# Altium PCB CLK_DISTRO.PcbDoc
Units mil, origin at the board's own origin, x right, y up, seen from the top; angles counter-clockwise.
Board outline 2000 x 1000 mil, 2 copper layers (Top Layer, Bottom Layer); 31 components, 21 nets, 79 pads, 20 vias.
Unrouted connection lines stored in the file: 13.
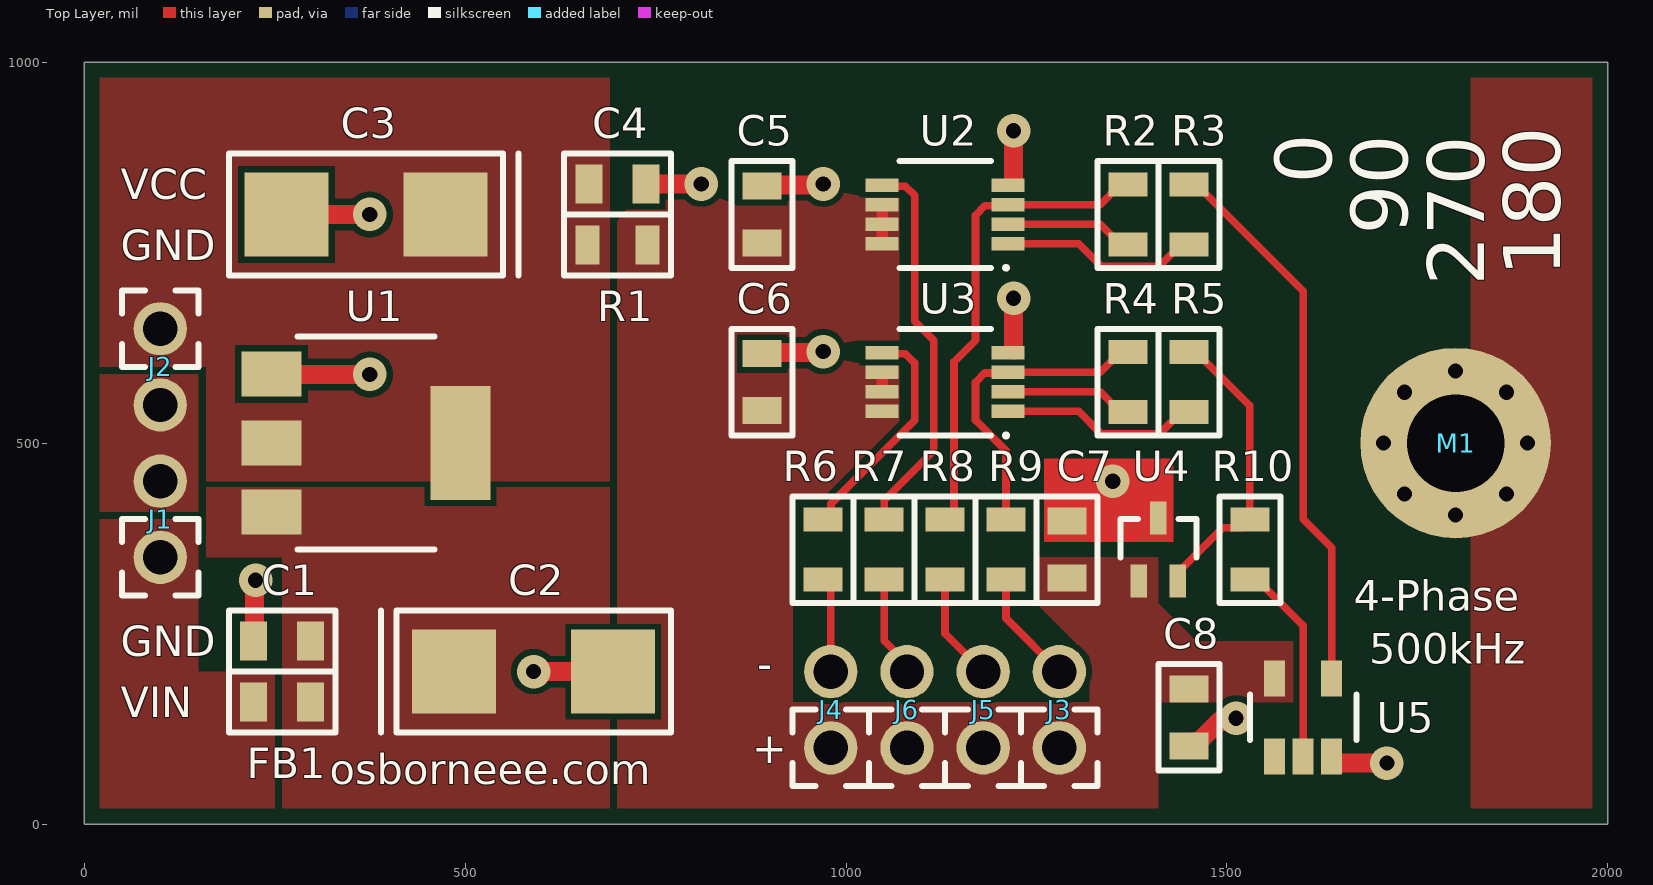
[diagram p0: Top Layer view]
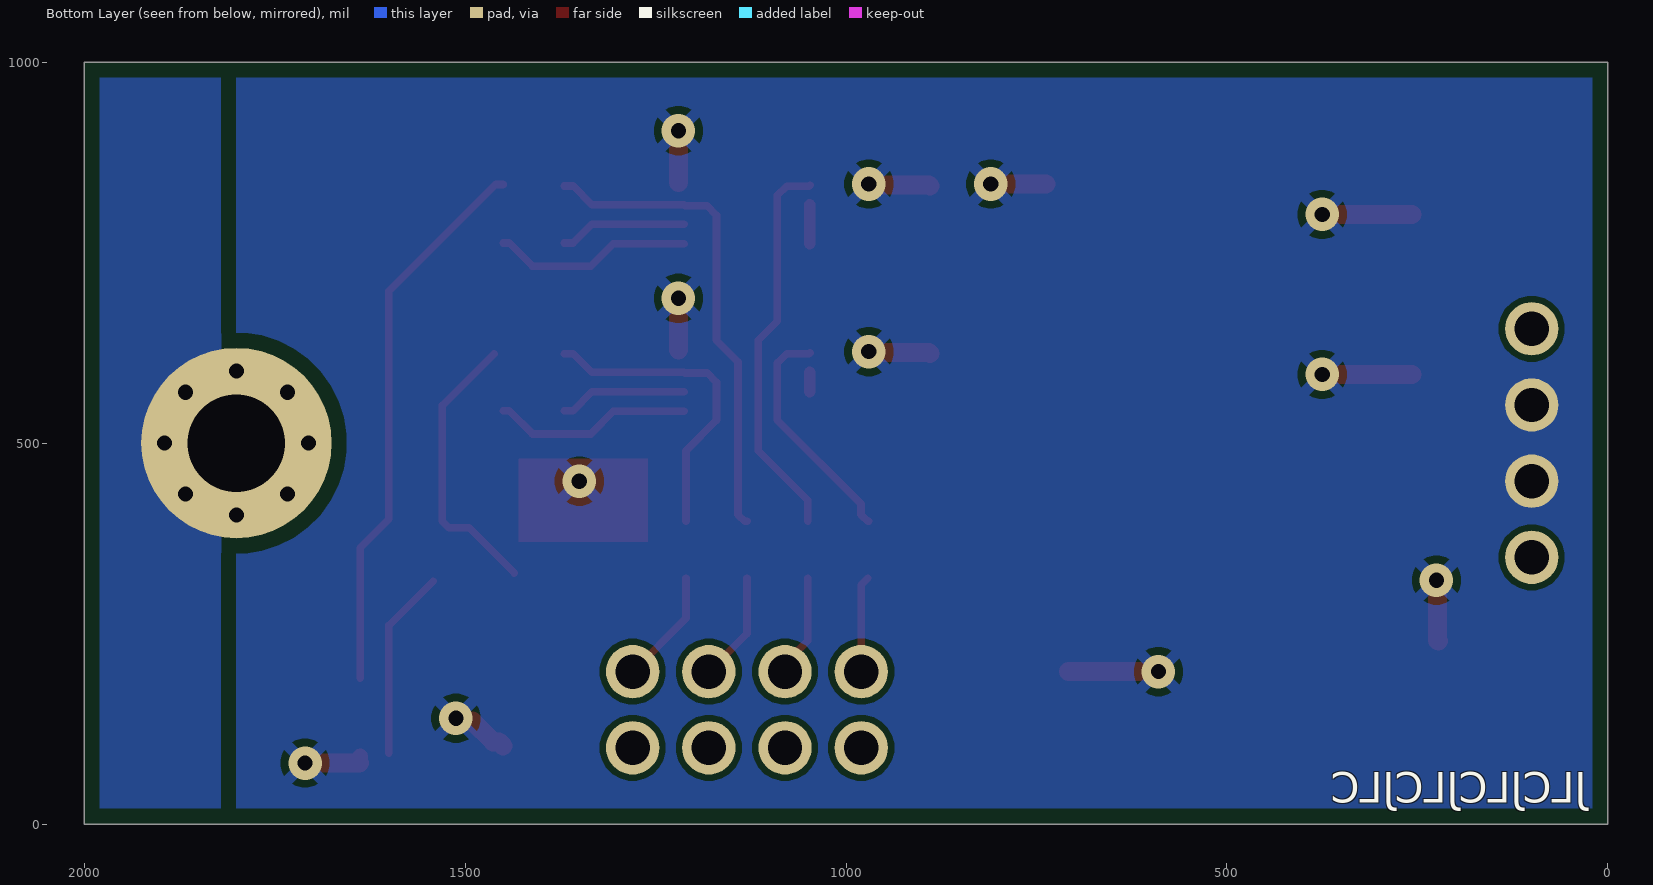
[diagram p1: Bottom Layer view, seen from below]

## Layer stack, top to bottom
Top Solder: solder mask 0.4, Solder Resist, Dk 3.5
Top Layer: signal copper 1.4
Dielectric 1: dielectric 12.6, FR-4, Dk 4.8
Bottom Layer: signal copper 1.4
Bottom Solder: solder mask 0.4, Solder Resist, Dk 3.5

## Board outline
0,0 0,1000 2000,1000 2000,0

## Design rules (kind name [scope] priority, off if disabled: settings)
BoardOutlineClearance [All] p1: gap=20 ignorepadtopadclearanceinfootprint=FALSE
Clearance Clearance_CNGD [InNet('CGND')] p1: gap=20 ignorepadtopadclearanceinfootprint=FALSE
Clearance "Clearance Bottom Layer" [OnLayer('Bottom Layer')] p2: gap=8 ignorepadtopadclearanceinfootprint=TRUE except(10: Arc-Text Track-Text SMDPad-Text THPad-Text Via-Text Fill-Text Poly-Text Region-Text Text-Text)
Clearance "Clearance Top Layer" [OnLayer('Top Layer')] p3: gap=8 ignorepadtopadclearanceinfootprint=TRUE except(10: Arc-Text Track-Text SMDPad-Text THPad-Text Via-Text Fill-Text Poly-Text Region-Text Text-Text)
Clearance [All] p4: gap=7.87 ignorepadtopadclearanceinfootprint=FALSE except(3.5: Arc-Arc Arc-Track Arc-SMDPad Track-Track Track-SMDPad SMDPad-SMDPad; 5: Arc-Via Track-Via SMDPad-Via THPad-Via Via-Via; 10: Arc-Text Track-Text SMDPad-Text THPad-Text Via-Text Fill-Text Poly-Text Region-Text Text-Text)
HoleSize [All] p1: absolutevalues=TRUE maxlimit=248.03 minlimit=7.87 maxpercent=80.000 minpercent=20.000
MinimumAnnularRing [All] p1: minimumring=3
MinimumSolderMaskSliver [All] p1: minsoldermaskwidth=3.94
PolygonConnect [All] p1: connectstyle=Direct reliefconductorwidth=20 reliefentries=4 polygonreliefangle="90 Angle" airgapwidth=10
RoutingCorners [All] p1: cornerstyle=Round minsetback=100 maxsetback=100
RoutingVias [All] p1: holewidth=19.68 width=39.37 viastyle="Through Hole" minholewidth=7.87 minwidth=17.72 maxholewidth=39.37 maxwidth=78.74
SilkToSilkClearance [All] p1: silktosilkclearance=3.94
SilkToSolderMaskClearance [IsPad] p1: minsilkscreentomaskgap=3.94 clearancetoexposedcopper=TRUE
SolderMaskExpansion [All] p1: expansion=2.2 istentingtop=FALSE
Width [All] p1: maxlimit=100 minlimit=3.5 preferedwidth=15
25 further rules are at their usual default settings.

## Components (designator, comment, footprint, x,y, rotation, side; value= is the part's Value field where it differs from the comment)
C1 "732-12244-1-ND" C0805 260,240 r180 top value=100nF
C2 "478-7582-1-ND" TRJC 590,200 r0 top value=10uF
C3 "478-7582-1-ND" TRJC 370,800 r180 top value=10uF
C4 "732-12244-1-ND" C0805 700,840 r0 top value=100nF
C5 "732-12244-1-ND" C0805 890,800 r90 top value=100nF
C6 "732-12244-1-ND" C0805 890,580 r90 top value=100nF
C7 "732-12244-1-ND" C0805 1290,360 r90 top value=100nF
C8 "732-12244-1-ND" C0805 1450,140 r270 top value=100nF
FB1 "553-2394-1-ND" C0805 260,160 r0 top value="330Ω/100MHz (1.5A)"
J1 "#NAME?" HEADER_1X2 100,400 r90 top
J2 "#NAME?" HEADER_1X2 100,600 r270 top
J3 "#NAME?" HEADER_1X2 1280,150 r90 top
J4 "#NAME?" HEADER_1X2 980,150 r90 top
J5 "#NAME?" HEADER_1X2 1180,150 r90 top
J6 "#NAME?" HEADER_1X2 1080,150 r90 top
M1 "#NAME?" MTG_HOLE_NO4 1800,500 r0 top
R1 "RMCF0805ZT0R00CT-ND" R0805 700,760 r0 top value="0Ω (2A)"
R2 "RMCF0805FT1K00CT-ND" R0805 1370,800 r90 top value=1kΩ
R3 "RMCF0805FT1K00CT-ND" R0805 1450,800 r270 top value=1kΩ
R4 "RMCF0805FT1K00CT-ND" R0805 1370,580 r90 top value=1kΩ
R5 "RMCF0805FT1K00CT-ND" R0805 1450,580 r270 top value=1kΩ
R6 "RMCF0805FT270RCT-ND" R0805 970,360 r90 top value=270Ω
R7 "RMCF0805FT270RCT-ND" R0805 1050,360 r90 top value=270Ω
R8 "RMCF0805FT270RCT-ND" R0805 1130,360 r90 top value=270Ω
R9 "RMCF0805FT270RCT-ND" R0805 1210,360 r90 top value=270Ω
R10 "RMCF0805FT1K00CT-ND" R0805 1530,360 r270 top value=1kΩ
U1 "NCP1117IST50T3G" SOT223 370,500 r0 top
U2 "74LVC1G74" TSSOP-8 1130,800 r180 top
U3 "74LVC1G74" TSSOP-8 1130,580 r180 top
U4 "MAX7375AXR105" SC70 1410,360 r90 top
U5 "MC74VHC1GT14" TSOP-5 1600,140 r90 top

## Footprints (in the part's own frame and the unit in brackets; to place one, negate y for a bottom-side part, rotate by r counter-clockwise, add the part's x,y. Pads: shape width x height; smd on the part's side, far side on the other; paste and mask are expansions set on the pad)
C0805 [mm]
  rect 0.9x1.3 smd: 1(-0.95,0) 2(0.95,0)
  silkscreen extent -1.78,-1.02 1.78,1.02, body extent -1.02,-0.51 1.02,0.51, height 1.25
HEADER_1X2 [mil]
  round 70 hole 45: 1(-50,0) 2(50,0)
  silkscreen extent -100,-50 0,50
MTG_HOLE_NO4 [mil]
  round 250 hole 128: 1(0,0)
R0805 [mm]
  rect 0.8x1.3 smd: 1(-1,0) 2(1,0)
  silkscreen extent -1.78,-1.02 1.78,1.02, body extent -1.02,-0.51 1.02,0.51, height 0.5
SC70 [mm] "SOT23, 3-Leads, Body 2.00x2.10mm, Pitch 0.65mm, IPC Low Density"
  rect 1.1x0.55 smd: 1(-1.05,0.65) 2(-1.05,-0.65) 3(1.05,0)
  silkscreen extent -0.25,-1.27 1.02,1.27, body extent -1.2,-1.1 1.2,1.1, height 1.1
SOT223 [mm] "SOT223, 4-Leads, Body 6.50x7.00mm (avg), Pitch 2.30mm, IPC Low Density"
  rect 2x1.5 smd: 1(-3.15,2.3) 2(-3.15,0) 3(-3.15,-2.3)
  rect 2x3.8 smd: 2(3.15,0)
  silkscreen extent -2.29,-3.56 2.29,3.56, body extent -3.65,-3.35 3.65,3.35, height 1.8
TRJC [mm]
  rect 2.8x2.8 smd: 1(-2.65,0) 2(2.65,0)
  silkscreen extent -5.08,-2.03 4.57,2.03, body extent -3,-1.6 3,1.6, height 2.6
TSOP-5 [mm] "SOT23, 5-Leads, Body 3.00x2.75mm, Pitch 0.95mm, IPC Low Density"
  rect 1.2x0.7 smd: 1(-1.3,0.95) 2(-1.3,0) 3(-1.3,-0.95) 4(1.3,-0.95) 5(1.3,0.95)
  silkscreen extent -0.76,-1.78 0.76,1.78, body extent -1.5,-1.58 1.5,1.58, height 1.1
TSSOP-8 [mm] "TSOP, 8-Leads, Body 3.00x3.00mm, Pitch 0.65mm, IPC Low Density"
  rect 1.1x0.44 smd: 1(-2.1,0.975) 2(-2.1,0.325) 3(-2.1,-0.325) 4(-2.1,-0.975) 5(2.1,-0.975) 6(2.1,-0.325) 7(2.1,0.325) 8(2.1,0.975)
  silkscreen extent -2.03,-1.78 1.52,1.78, body extent -1.99,-1.55 1.99,1.55, height 1.1

## Part data
C1 C4 C5 C6 C7 C8: library part CAP-CER-100N-10T-100V-0805, "CAP, CER, 100nF ±10%, 100V, 0805", Tolerance=10%, Voltage=100V, Supplier 1=Digi-Key, Supplier Part Number 1=732-12244-1-ND
C2 C3: library part CAP-TANT-10U-10T-35V-2312, "CAP, TANT, 10uF ±10%, 35V, 2312", Tolerance=10%, Voltage=35V, Supplier 1=Digi-Key, Supplier Part Number 1=478-7582-1-ND
FB1: library part BEAD-330R-1A5-0805, "BEAD, 330Ω/100MHz, 1.5A, 0805", Supplier 1=Digi-Key, Supplier Part Number 1=553-2394-1-ND
J1 J2 J3 J4 J5 J6: library part HEADER_1x2, "Header 1x2 THT"
M1: library part MTG_HOLE, "Mounting Hole"
R1: library part RES-JUMP-2A-0805, "RES, JUMP, 0Ω, 2A, 0805", Supplier 1=Digi-Key, Supplier Part Number 1=RMCF0805ZT0R00CT-ND
R2 R3 R4 R5 R10: library part RES-1K00-1T00-W125-0805, "RES, 1.00kΩ ±1.00%, 125mW, 0805", Power=125mW, Tolerance=1%, Supplier 1=Digi-Key, Supplier Part Number 1=RMCF0805FT1K00CT-ND
R6 R7 R8 R9: library part RES-270R-1T00-W125-0805, "RES, 270Ω ±1.00%, 125mW, 0805", Power=125mW, Tolerance=1%, Supplier 1=Digi-Key, Supplier Part Number 1=RMCF0805FT270RCT-ND
U1: "Low-Dropout Regulator, 5V, 1A", Supplier Part Number 1=488-NCP1117IST50T3GCT-ND, Supplier 1=Digi-Key
U2 U3: "D-Type Flip-Flop, TTL", Supplier Part Number 1=1727-7463-1-ND, Supplier 1=Digi-Key
U4: "OSC, 1MHz, CMOS", Supplier Part Number 1=MAX7375AXR105+TCT-ND, Supplier 1=Digi-Key
U5: "Schmitt Trigger Inverter, TTL", Supplier Part Number 1=M74VHC1GT14DTT1GOSCT-ND, Supplier 1=Digi-Key

## Via types
v1: diameter 44, hole 20, Top Layer to Bottom Layer, tented both sides, 20 vias

## Nets (pads, with @x,y where several pads share a name; then routed paths per layer and width w, separated by ;. In a path a pad name is that pad's centre, name@x,y a point inside that pad or via, vN(x,y) a via of type N, cw(c..) or ccw(c..) an arc to the next point about the centre after c; other vN are vias at no path point)
CGND: M1.1 | length 593.8
  Bottom Layer w10: v1(1894.5,500) ccw(c1800,500) v1(1894.5,500)
  other v1: 1800,405.5 1733.18,433.18 1866.82,433.18 1705.5,500 1733.18,566.82 1866.82,566.82 1800,594.5
GND: C1.2 C2.2 C3.2 C4.2 C5.2 C6.2 C7.2 C8.2 J1.2 J2.2 U1.1 U2.4 U3.4 U4.3 U5.3 | length 964.4
  Top Layer w20: U5.3 1637.4,83.78 U5.3@1641.18,80
  Top Layer w25: C1.2 223.8,241.2 223.8,318.8 v1(225,320) ; U1.1@256.89,590 v1(375,590) ; C3.2@256.89,800 v1(375,800) ; v1(590,200) C2.2@708.11,200 ; C4.2 v1(810,840) ; C6.2 891.3,618.7 968.7,618.7 v1(970,620) ; C5.2 891.3,838.7 968.7,838.7 v1(970,840) ; U3.4@1220,622.22 v1(1220,690) ; U2.4@1220,842.22 v1(1220,910) ; C8.2 1455.22,107.81 1463.09,107.81 1490.47,135.19 1508.41,135.19 v1(1512.05,138.83) ; U5.3@1638.68,80 v1(1710,80)
  other v1: 1350,450
NetC1_1: C1.1 C2.1 FB1.2 U1.3
NetC3_1: C3.1 C4.1 J2.1 R1.1 U1.2
NetFB1_1: FB1.1 J1.1
NetJ3_2: J3.2 R9.1 | length 151.6
  Top Layer w10: R9.1@1210,322.6 1210,270 J3.2
NetJ4_2: J4.2 R6.1 | length 126.2
  Top Layer w10: R6.1@971.22,322.6 980,313.82 J4.2
NetJ5_2: J5.2 R8.1 | length 143.3
  Top Layer w10: R8.1@1130,322.6 1130,250 J5.2
NetJ6_2: J6.2 R7.1 | length 135
  Top Layer w10: R7.1@1050,322.6 1050,240.71 1080,210.71 J6.2
NetR2_1: R2.1 U2.2 | length 167.5
  Top Layer w10: U2.2 1333.58,787.2 1358.19,762.6 R2.1@1370,762.6
NetR3_1: R3.1 U5.4 | length 731.6
  Top Layer w10: R3.1 1459.84,839.37 1600,699.21 1600,400 1637.4,362.6 U5.4
NetR3_2: R3.2 U2.1 | length 262.4
  Top Layer w10: U2.1 1305.5,761.61 1335.24,731.88 1411.41,731.88 1442.13,762.6 R3.2@1450,762.6
NetR4_1: R4.1 U3.2 | length 167.5
  Top Layer w10: U3.2 1333.58,567.2 1358.19,542.6 R4.1@1370,542.6
NetR5_1: R5.1 R10.1 U4.2 | length 370.8
  Top Layer w10: U4.2@1435.59,329.49 1494.72,388.62 1521.22,388.62 1530,397.4 1530,549.21 R5.1@1461.81,617.4
NetR5_2: R5.2 U3.1 | length 262.4
  Top Layer w10: U3.1 1305.5,541.61 1335.24,511.88 1411.41,511.88 1442.13,542.6 R5.2@1450,542.6
NetR10_2: R10.2 U5.2 | length 249.9
  Top Layer w10: R10.2@1541.81,318.66 1600,260.47 U5.2@1600,92.91
PHASE_0: R6.2 U3.5 | length 306.4
  Top Layer w10: R6.2@970,397.4 971.54,397.4 980.32,406.18 980.32,420.32 1090,530 1090,605 1077.73,617.27 1048.44,617.27 U3.5
PHASE_90: R7.2 U2.5 | length 513.1
  Top Layer w10: U2.5 1048.44,837.27 1077.73,837.27 1090,825 1090,660 1115,635 1115,490 1050,425 R7.2@1050,397.4
PHASE_180: R4.2 R9.2 U3.3 | length 414.7
  Top Layer w10: R9.2@1210,397.4 1210,490 1170,530 1170,580 1181.97,591.97 1211.85,591.97 U3.3 1333.58,592.8 1358.19,617.4 R4.2@1370,617.4
PHASE_270: R2.2 R8.2 U2.3 | length 635.9
  Top Layer w10: R8.2@1130,397.4 1133.03,397.4 1141.81,406.18 1141.81,606.81 1170,635 1170,799.14 1182.4,811.54 1211.43,811.54 U2.3 1333.58,812.8 1358.19,837.4 R2.2@1370,837.4
VCC: C5.1 C6.1 C7.1 C8.1 J3.1 J4.1 J5.1 J6.1 R1.2 U2.6 U2.7 U2.8 U3.6 U3.7 U3.8 U4.1 U5.5 | length 76.8
  Top Layer w15: U3.7 U3.6 ; U2.8 U2.7 U2.6
pads on no net: U5.1

## Polygon pours and split planes (outlines as drawn)
GND on Bottom Layer "GND_L02_P000" (solid, remove dead copper, pour order 0): 0,1000 1800,1000 1800,0 0,0
CGND on Bottom Layer "CGND_L02_P006" (solid, remove dead copper, pour order 6): 2000,1000 2000,0 1820,0 1820,1000
GND on Top Layer "GND_L01_P007" (solid, remove dead copper, pour order 7): 0,410 0,590 150,590 150,410
NetFB1_1 on Top Layer "NETFB1_1_L01_P004" (solid, remove dead copper, pour order 4): 150,400 150,200 250,200 250,0 0,0 0,400
NetC3_1 on Top Layer "NETC3_1_L01_P002" (solid, remove dead copper, pour order 2): 0,600 160,600 160,450 690,450 690,1000 0,1000
VCC on Top Layer "VCC_L01_P001" (solid, remove dead copper, pour order 1): 1460,240 1410,290 1410,350 1250,350 1250,290 1320,220 1320,160 930,160 930,430 1070,430 1070,830 700,830 700,0 1410,0 1410,160 1590,160 1590,240
NetC1_1 on Top Layer "NETC1_1_L01_P003" (solid, remove dead copper, pour order 3): 690,450 690,0 260,0 260,350 160,350 160,450
CGND on Top Layer "CGND_L01_P005" (solid, remove dead copper, pour order 5): 2000,1000 2000,0 1820,0 1820,1000

## Other copper
Top Layer:
  rectangle net GND: 1260,370 1430,480

## Silkscreen, mask and mechanical layers (free items; w line width, h text height)
Top Overlay:
  text "0" at 1637.49,840.01 h75 r90
  text "VCC" at 48,820.01 h40
  text "90" at 1737.49,773.24 h75 r90
  text "GND" at 48,740.01 h40
  text "180" at 1937.49,718.25 h75 r90
  text "270" at 1837.49,706.47 h75 r90
  text "4-Phase" at 1666.71,280.01 h40
  text "GND" at 48,220.01 h40
  text "-" at 903.33,219.99 h40 r180
  text "500kHz" at 1686.7,210.01 h40
  text "VIN" at 48,140.01 h40
  text "+" at 876.67,80.01 h40
  text "osborneee.com" at 322.72,52 h40
Bottom Overlay:
  text "JLCJLCJLCJLC" at 28,28 h40
Mechanical Outline:
  the board outline again, w10